# EAGLE board L80_Breakout1 (EAGLE 9.6.2)
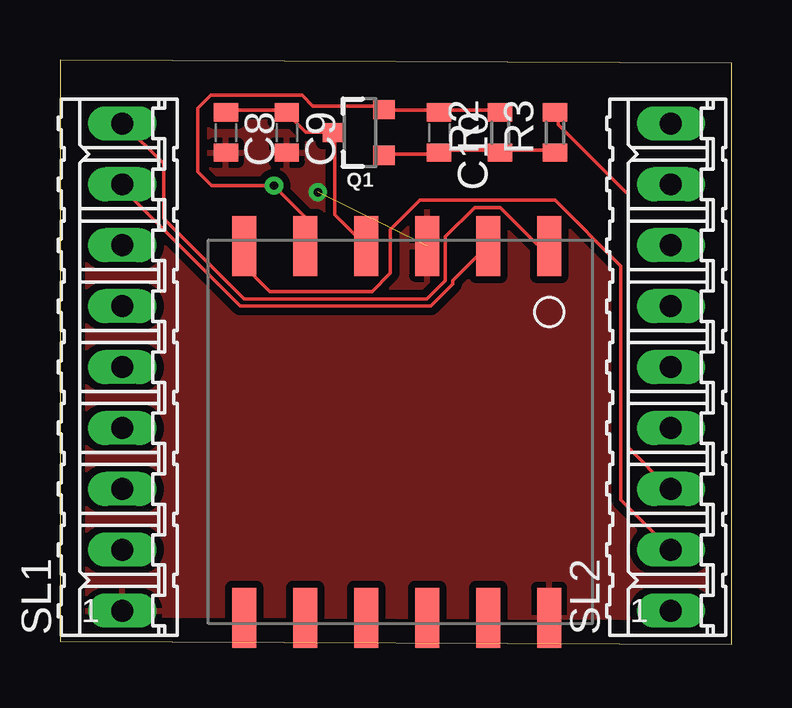
[diagram p0: board, top side]
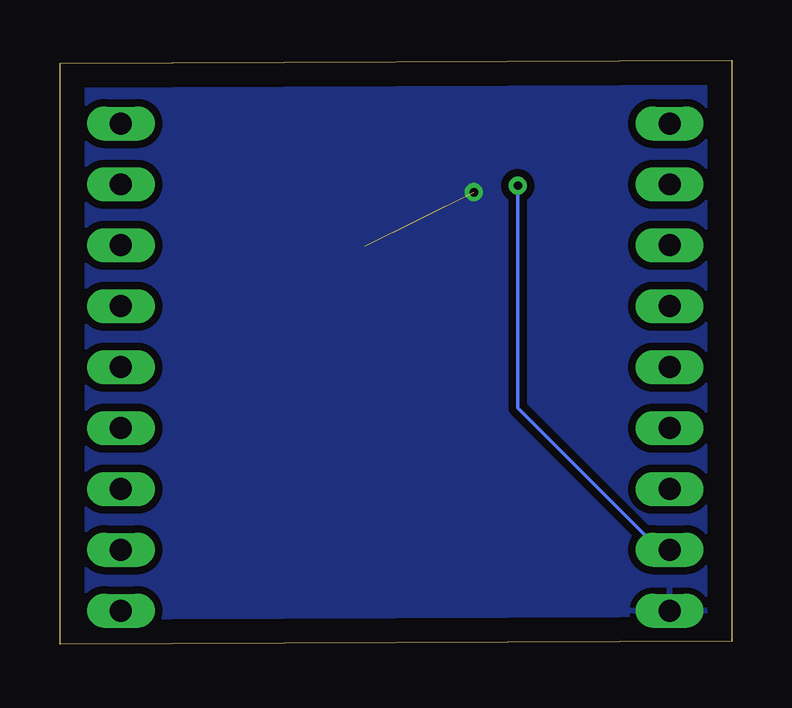
[diagram p1: board, bottom side, seen from below]

Size 27.99 x 24.36 mm. Coordinates in mm from the lower left corner, seen from the top.
Outline: 27.99,0 27.99,24.24 0,24.36 0,0.13 27.99,0
Copper layers (1*16): Top 0.035mm / dielectric 1.5mm / Bottom 0.035mm
Design rules "default": minimum track width 6mil, minimum drill 0.35mm, track to track 6mil, track to pad 6mil, pad to pad 6mil, via to via 6mil, smd to smd 6mil, copper to edge 40mil, drill to drill 6mil, minimum pad ring 10mil, minimum via ring 8mil, stop-mask expansion 4mil, vias tented up to drill 0mil, thermal gap 10mil
Net classes: 0 default: width 0 mm, drill 0 mm; 1 power: width 0.381 mm, clearance 0.254 mm

## Footprints (pad centres in the part's own frame; a part is rotated, then mirrored left to right if it is on the bottom)
C0603-THINCREAM = smd 0.762 x 1.016: 1 -0.838,0; 2 0.838,0
QUECTEL-L80-NOCREAM = smd 2.5 x 1: 1 17.75,3.8; 2 17.75,6.34; 3 17.75,8.88; 4 17.75,11.42; 5 17.75,13.96; 6 17.75,16.5; 7 2.25,16.5; 8 2.25,13.96; 9 2.25,11.42; 10 2.25,8.88; 11 2.25,6.34; 12 2.25,3.8
SOT23-3 = smd 0.8 x 0.9: 1 -0.95,-1; 2 0.95,-1; 3 0,1.1
R0603-THINCREAM = smd 0.762 x 1.016: 1 -0.838,0; 2 0.838,0
09P = drill 0.914 long: 1 -10.16,0; 2 -7.62,0; 3 -5.08,0; 4 -2.54,0; 5 0,0; 6 2.54,0; 7 5.08,0; 8 7.62,0; 9 10.16,0

## Placement (x,y rotation side)
C8  10uF  [C0603-THINCREAM]  6.91,21.34 270 top
C9  100nF  [C0603-THINCREAM]  9.45,21.34 270 top
C10  4.7uF  [C0603-THINCREAM]  15.8,21.34 270 top
GPS  QUECTEL-L80NOCREAM  [QUECTEL-L80-NOCREAM]  24.18,-1.14 90 top
Q1  IRLML6402  [SOT23-3]  12.5,21.34 90 top
R2  47k  [R0603-THINCREAM]  18.34,21.34 90 top
R3  2K2  [R0603-THINCREAM]  20.62,21.34 90 top
SL1  [09P]  2.59,11.56 90 top
SL2  [09P]  25.45,11.56 90 top

## Library data of the parts
C8 C10 R2 R3 = nootropicdesign; OC_FARNELL: unknown
C9 = nootropicdesign; MF: AVX; MPN: 02016D104KAT2A; OC_FARNELL: 1657913
GPS = quectel; OC_FARNELL: unknown
Q1 = ianc; OC_FARNELL: unknown; PROD_ID: IRLML6402TRPBF
SL1 SL2 = con-amp-quick; OC_FARNELL: unknown; OC_NEWARK: unknown

## Nets
1PPS: GPS.6 SL2.2
GND: C8.2 C9.2 GPS.3 GPS.12 SL1.1
GPSPOWER: R3.2 SL2.3
N$7: C8.1 C9.1 GPS.4 Q1.3
N$8: C10.2 Q1.1 R2.1 R3.1
RX: GPS.2 SL1.8
TX: GPS.1 SL1.9
VCC: C10.1 GPS.5 Q1.2 R2.2 SL1.2

## Tracks (layer width: path | path; a pad name or v marks a point on that pad's centre or on a via)
1PPS
  Top 0.152: SL2.2 23.37,6.02 23.37,15.77 20.62,18.52 14.99,18.52 13.77,17.3 13.77,15.47 13,14.71 8.74,14.71 7.82,15.62 7.82,16.54 GPS.6
GND  (via drill 0.35)  (1 unrouted)
  other vias: 10.74,18.85
  pour Top (isolate 0.305): 27.99,24.26 0.05,24.26 0.05,0.13 27.99,0.13
  pour Bottom (isolate 0.305): 0.05,0.13 0.05,24.26 27.99,24.26 27.99,0.13
GPSPOWER
  Top 0.152: SL2.3 25.35,6.53 23.67,8.2 23.67,18.85 23.57,18.85 20.75,21.67 20.75,22.12 R3.2
N$7
  Top 0.152: GPS.4 12.85,16.69 12.85,17.6 GPS.4 | C8.1 7.04,22.28 9.32,22.28 C9.1 9.47,22.12 10.24,21.36 11.3,21.36 Q1.3 11.46,21.21 11.46,17.91 GPS.4
N$8
  Top 0.152: Q1.1 13.59,20.45 15.72,20.45 C10.2 15.88,20.6 18.31,20.6 R2.1 18.47,20.6 20.6,20.6 R3.1
RX
  Top 0.152: GPS.2 17.73,16.54 16.36,15.16 16.36,15.01 15.44,14.1 7.52,14.1 2.49,19.13 SL1.8
TX
  Top 0.152: GPS.1 20.32,16.69 19.86,16.69 18.34,18.21 17.27,18.21 16.05,16.99 16.05,15.16 15.29,14.4 7.67,14.4 4.32,17.75 4.32,20.04 2.64,21.72 SL1.9
VCC  (via drill 0.35)
  Top 0.152: 10.26,16.69 GPS.5 10.22,17.82 v8.92,19.13 6.32,19.13 5.74,19.71 5.74,20.29 5.74,20.45 5.74,22.35 6.27,22.89 10.08,22.89 10.54,22.43 13.44,22.43 Q1.2 13.59,22.28 15.72,22.28 C10.1 15.88,22.28 18.31,22.28 R2.2
  Bottom 0.152: v8.92,19.13 8.92,9.85 3.1,4.04 2.64,4.04 SL1.2